# Altium PCB g3.PcbDoc
Units mm, origin at the board's own origin, x right, y up, seen from the top; angles counter-clockwise.
Board outline 274.95 x 168.53 mm, 2 copper layers (Top Layer, Bottom Layer); 104 components, 64 nets, 340 pads, 23 vias.
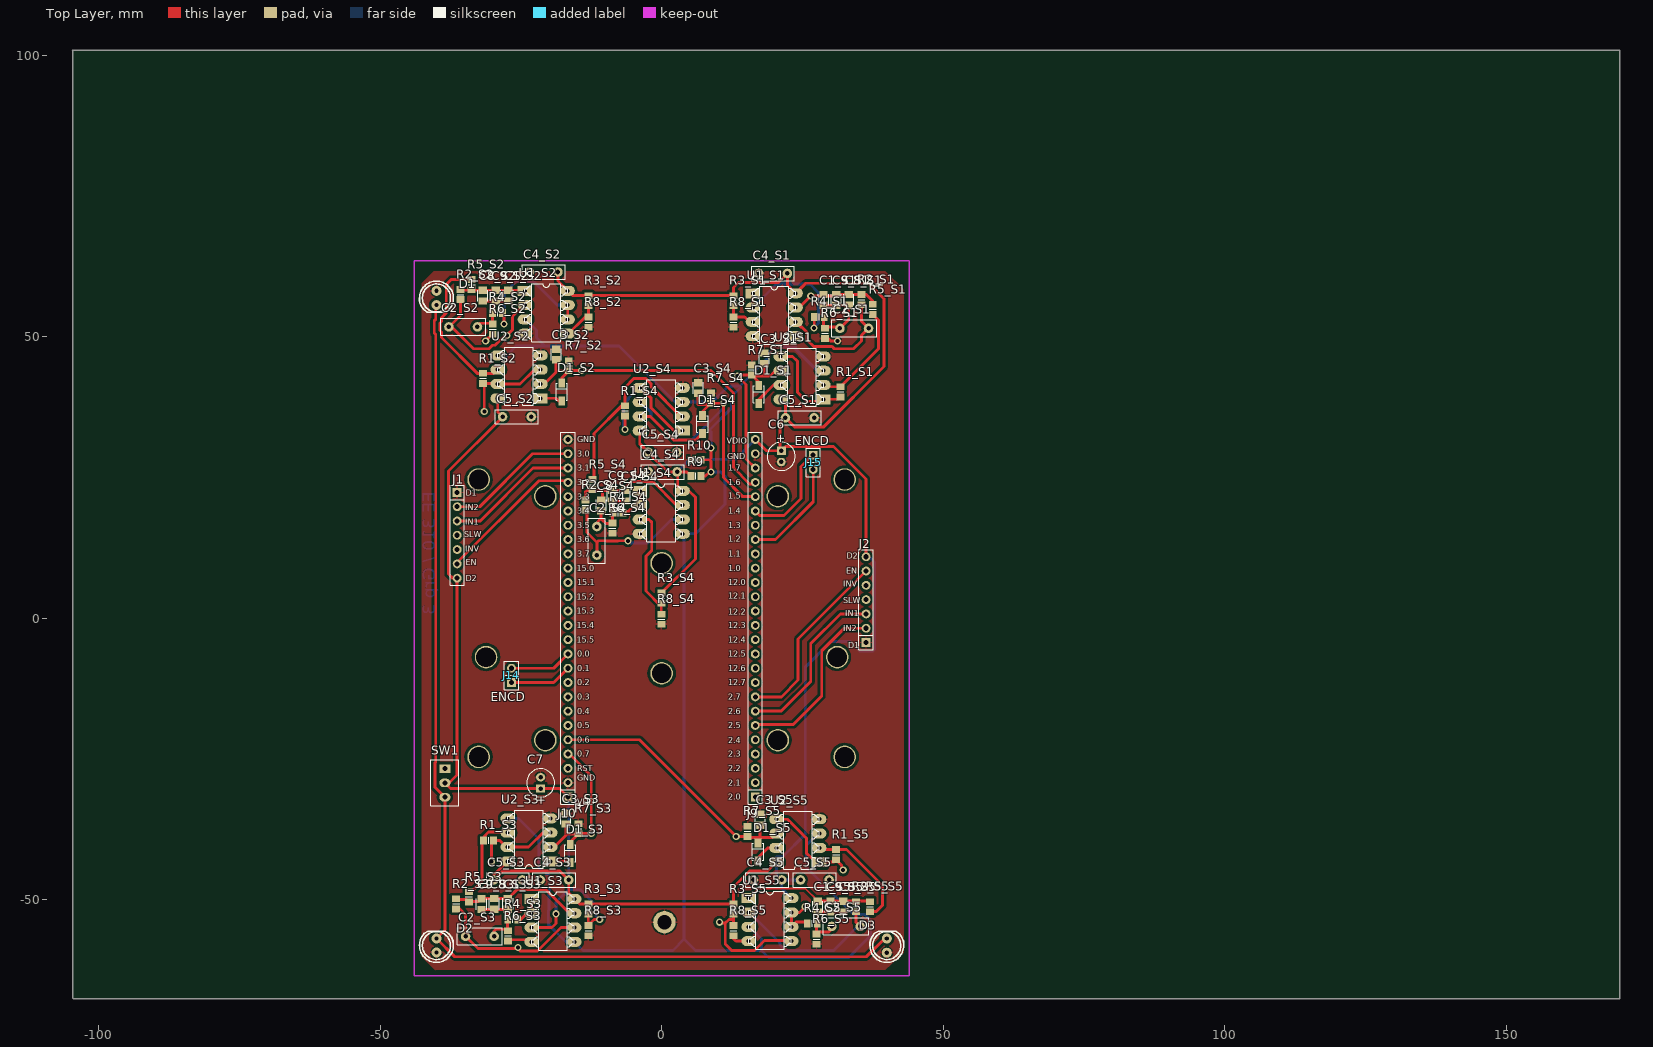
[diagram p0: Top Layer view]
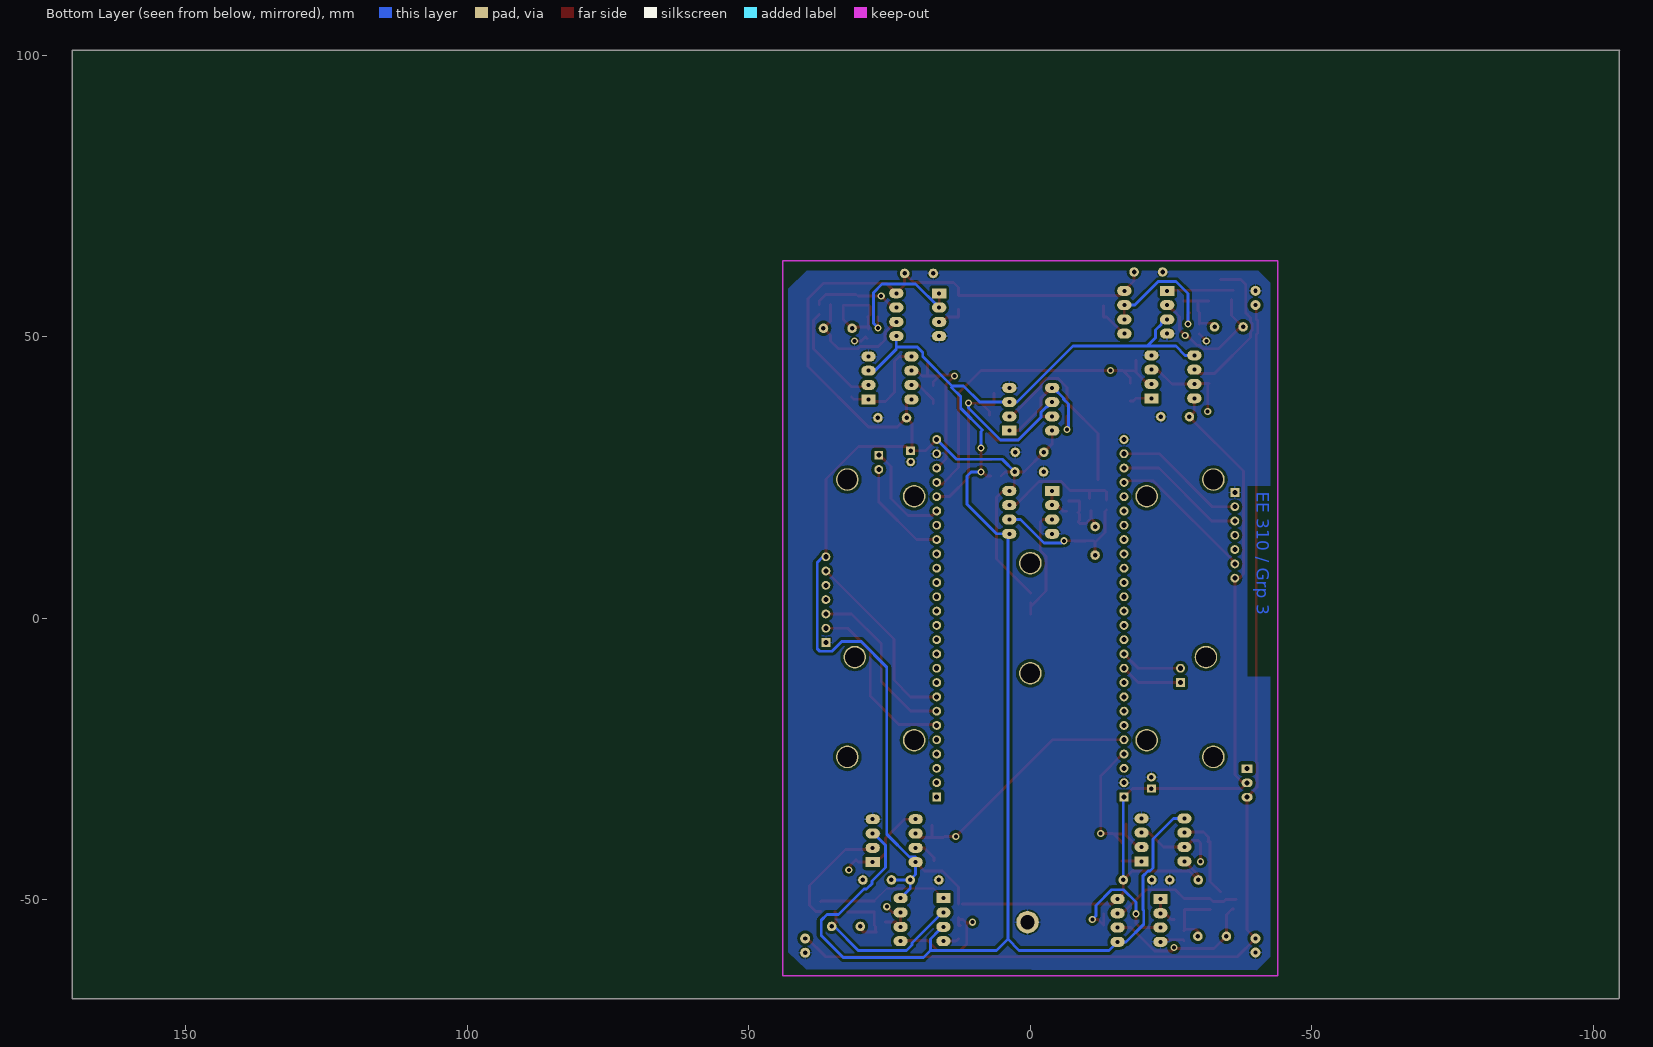
[diagram p1: Bottom Layer view, seen from below]
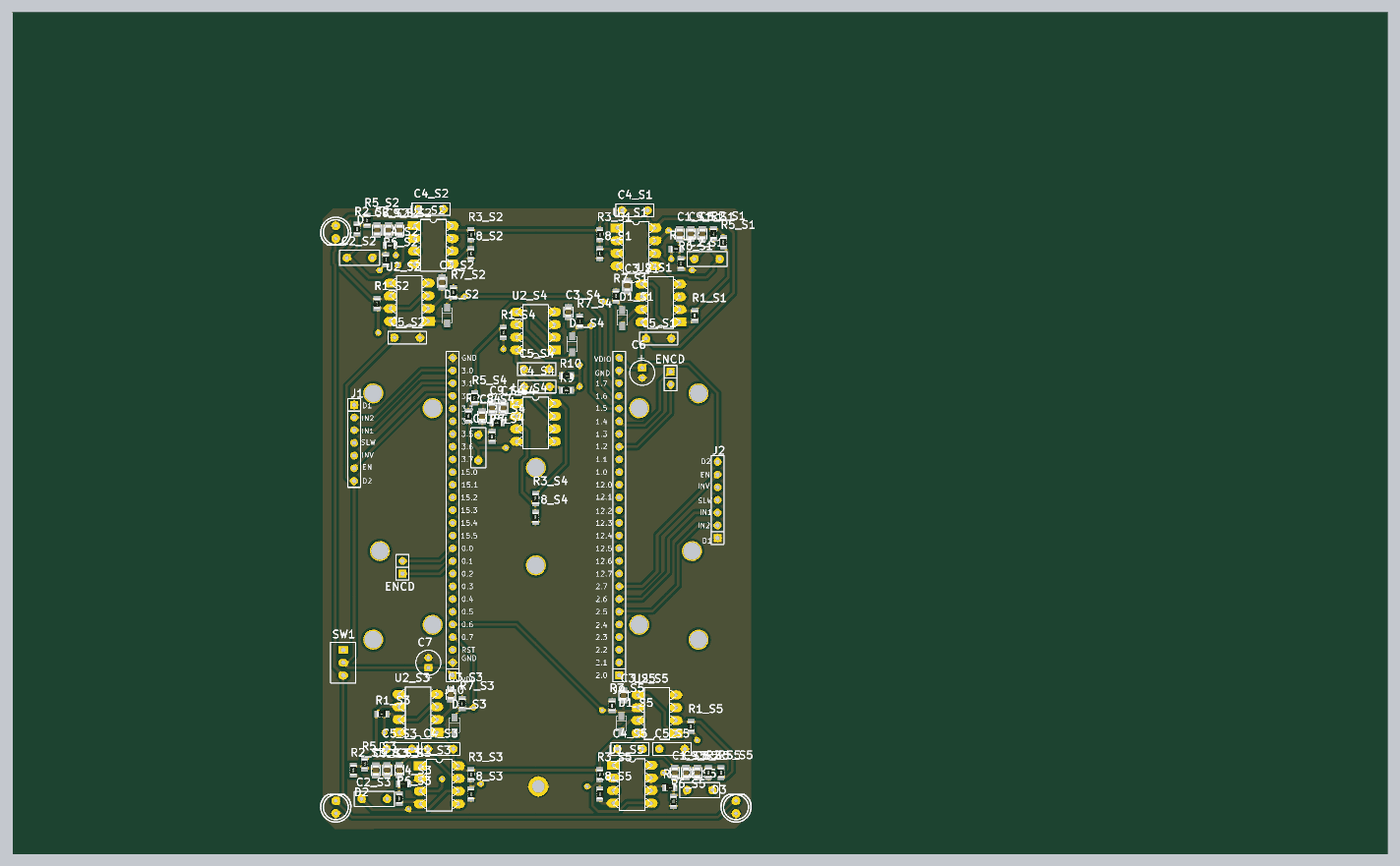
[diagram p2: 3D render of the assembled board from above, using the file's embedded part models]

## Layer stack, top to bottom
Top Solder: solder mask 0.0102, Solder Resist, Dk 3.5
Top Layer: signal copper 0.0356
Dielectric1: dielectric 0.32, FR-4, Dk 4.8
Bottom Layer: signal copper 0.0356
Bottom Solder: solder mask 0.0102, Solder Resist, Dk 3.5

## Board outline
-104.6,-67.48 -104.473,-67.607 170.228,-67.607 170.228,100.922 -104.727,100.922 -104.6,100.795 -104.6,-67.48

## Design rules (kind name [scope] priority, off if disabled: settings)
Clearance [All] p1: gap=0.5 ignorepadtopadclearanceinfootprint=FALSE
HoleSize [All] p1: absolutevalues=TRUE maxlimit=10 minlimit=0.025 maxpercent=80.000 minpercent=20.000
PolygonConnect [All] p1: connectstyle=Relief reliefconductorwidth=0.305 reliefentries=4 polygonreliefangle="90 Angle" airgapwidth=0.254
RoutingVias [All] p1: holewidth=0.7 width=1.7 viastyle="Through Hole" minholewidth=0.7 minwidth=1.6 maxholewidth=10 maxwidth=10
SilkToSolderMaskClearance SilkscreenOverComponentPads [IsPad] p1: minsilkscreentomaskgap=0.254 clearancetoexposedcopper=TRUE
SolderMaskExpansion [All] p1: expansion=0.102
Width [All] p1: maxlimit=0.762 minlimit=0.3 preferedwidth=0.6 minimp=50.000000 maximp=50.000000 favimp=50.000000
28 further rules are at their usual default settings.

## Classes and differential pairs
channel class 301_Sensor: S1 S2 S3 S4 S5
net class Vout[1..5]: Vout1 Vout2 Vout3 Vout4 Vout5
component class S1: C1_S1 C2_S1 C3_S1 C4_S1 C5_S1 C8_S1 C9_S1 D1_S1 R1_S1 R2_S1 R3_S1 R4_S1 R5_S1 R6_S1 R7_S1 R8_S1 U1_S1 U2_S1
component class S2: C1_S2 C2_S2 C3_S2 C4_S2 C5_S2 C8_S2 C9_S2 D1_S2 R1_S2 R2_S2 R3_S2 R4_S2 R5_S2 R6_S2 R7_S2 R8_S2 U1_S2 U2_S2
component class S3: C1_S3 C2_S3 C3_S3 C4_S3 C5_S3 C8_S3 C9_S3 D1_S3 R1_S3 R2_S3 R3_S3 R4_S3 R5_S3 R6_S3 R7_S3 R8_S3 U1_S3 U2_S3
component class S4: C1_S4 C2_S4 C3_S4 C4_S4 C5_S4 C8_S4 C9_S4 D1_S4 R1_S4 R2_S4 R3_S4 R4_S4 R5_S4 R6_S4 R7_S4 R8_S4 U1_S4 U2_S4
component class S5: C1_S5 C2_S5 C3_S5 C4_S5 C5_S5 C8_S5 C9_S5 D1_S5 R1_S5 R2_S5 R3_S5 R4_S5 R5_S5 R6_S5 R7_S5 R8_S5 U1_S5 U2_S5

## Components (designator, comment, footprint, x,y, rotation, side; value= is the part's Value field where it differs from the comment)
C1_S1 "1uF" ece-CC2012-0805 28.75,56.55 r270 top (schematic designator C1)
C1_S2 "1uF" ece-CC2012-0805 -27.25,57.3 r270 top (schematic designator C1)
C1_S3 "1uF" ece-CC2012-0805 -27.3,-50.73 r270 top (schematic designator C1)
C1_S4 "1uF" ece-CC2012-0805 -6.5,21.75 r270 top (schematic designator C1)
C1_S5 "1uF" ece-CC2012-0805 27.75,-51.25 r270 top (schematic designator C1)
C2_S1 "39nF" "FILM CAP-0.2" 34.21,51.5 r0 top (schematic designator C2)
C2_S2 "39nF" "FILM CAP-0.2" -35.25,51.75 r180 top (schematic designator C2)
C2_S3 "39nF" "FILM CAP-0.2" -32.29,-56.5 r180 top (schematic designator C2)
C2_S4 "39nF" "FILM CAP-0.2" -11.5,13.75 r270 top (schematic designator C2)
C2_S5 "39nF" "FILM CAP-0.2" 32.75,-54.75 r0 top (schematic designator C2)
C3_S1 "470nF" ece-CC2012-0805 18.256,46.164 r90 top (schematic designator C3)
C3_S2 "470nF" ece-CC2012-0805 -18.75,46.85 r90 top (schematic designator C3)
C3_S3 "470nF" ece-CC2012-0805 -17,-35.59 r90 top (schematic designator C3)
C3_S4 "470nF" ece-CC2012-0805 6.488,40.9 r90 top (schematic designator C3)
C3_S5 "470nF" ece-CC2012-0805 17.5,-35.8 r90 top (schematic designator C3)
C4_S1 "100nF" ece-RAD0.2 22.33,61.25 r180 top (schematic designator C4)
C4_S2 "100nF" ece-RAD0.2 -18.42,61.5 r180 top (schematic designator C4)
C4_S3 "100nF" ece-RAD0.2 -16.5,-46.5 r180 top (schematic designator C4)
C4_S4 "100nF" ece-RAD0.2 2.738,25.99 r180 top (schematic designator C4)
C4_S5 "100nF" ece-RAD0.2 21.33,-46.5 r180 top (schematic designator C4)
C5_S1 "100nF" ece-RAD0.2 22,35.6 r0 top (schematic designator C5)
C5_S2 "100nF" ece-RAD0.2 -28.256,35.786 r0 top (schematic designator C5)
C5_S3 "100nF" ece-RAD0.2 -29.83,-46.5 r0 top (schematic designator C5)
C5_S4 "100nF" ece-RAD0.2 -2.392,29.49 r0 top (schematic designator C5)
C5_S5 "100nF" ece-RAD0.2 24.67,-46.5 r0 top (schematic designator C5)
C6 "1uF" ece-RAD-CAP--5X6.8 21.25,29.75 r270 top
C7 "1uF" ece-RAD-CAP--5X6.8 -21.5,-30.25 r90 top
C8_S1 "1uF" ece-CC2012-0805 33.25,56.55 r270 top (schematic designator C8)
C8_S2 "1uF" ece-CC2012-0805 -31.75,57.3 r270 top (schematic designator C8)
C8_S3 "1uF" ece-CC2012-0805 -29.75,-50.75 r270 top (schematic designator C8)
C8_S4 "1uF" ece-CC2012-0805 -10.75,20.05 r270 top (schematic designator C8)
C8_S5 "1uF" ece-CC2012-0805 32.25,-51.25 r270 top (schematic designator C8)
C9_S1 "1uF" ece-CC2012-0805 31,56.55 r270 top (schematic designator C9)
C9_S2 "1uF" ece-CC2012-0805 -29.5,57.3 r270 top (schematic designator C9)
C9_S3 "1uF" ece-CC2012-0805 -32,-50.8 r270 top (schematic designator C9)
C9_S4 "1uF" ece-CC2012-0805 -8.75,21.75 r270 top (schematic designator C9)
C9_S5 "1uF" ece-CC2012-0805 30,-51.25 r270 top (schematic designator C9)
D1 "LED" LED0.1/5MM#1 -40,55.62 r180 top locked
D1_S1 "1N4148W-7-F" SOD123 17.25,39.75 r90 top (schematic designator D1)
D1_S2 "1N4148W-7-F" SOD123 -17.75,40.25 r90 top (schematic designator D1)
D1_S3 "1N4148W-7-F" SOD123 -16.25,-41.75 r90 top (schematic designator D1)
D1_S4 "1N4148W-7-F" SOD123 7.25,34.5 r90 top (schematic designator D1)
D1_S5 "1N4148W-7-F" SOD123 17.103,-41.471 r90 top (schematic designator D1)
D2 "LED" LED0.1/5MM#2 -40,-56.88 r0 top locked
D3 "LED" LED0.1/5MM#1 40,-56.88 r0 top locked
J1 "CON7" SIP7 -36.322,22.352 r270 top locked
J2 "CON7" SIP7 36.322,-4.318 r90 top locked
J9 "26PIN" SIP26 16.637,-31.75 r90 top locked
J10 "26PIN" SIP26 -16.637,-31.75 r90 top locked
J14 "ENCD" sip2 -26.67,-11.43 r90 top locked
J15 "ENCD" sip2 26.924,28.956 r270 top locked
R1_S1 "100K" RESC2012-0805SM 31.756,40.214 r270 top (schematic designator R1)
R1_S2 "100K" RESC2012-0805SM -31.75,42.6 r270 top (schematic designator R1)
R1_S3 "100K" RESC2012-0805SM -30.75,-39.5 r0 top (schematic designator R1)
R1_S4 "100K" RESC2012-0805SM -6.512,36.84 r270 top (schematic designator R1)
R1_S5 "100K" RESC2012-0805SM 31,-42 r270 top (schematic designator R1)
R2_S1 "330K" RESC2012-0805SM 35.5,56.6 r90 top (schematic designator R2)
R2_S2 "330K" RESC2012-0805SM -35.75,57.5 r90 top (schematic designator R2)
R2_S3 "330K" RESC2012-0805SM -36.5,-50.75 r90 top (schematic designator R2)
R2_S4 "330K" RESC2012-0805SM -13.5,20.1 r90 top (schematic designator R2)
R2_S5 "330K" RESC2012-0805SM 34.5,-51.25 r90 top (schematic designator R2)
R3_S1 "Light Sensor" RESC2012-0805SM 12.756,56.4 r90 top (schematic designator R3)
R3_S2 "Light Sensor" RESC2012-0805SM -13,56.4 r90 top (schematic designator R3)
R3_S3 "Light Sensor" RESC2012-0805SM -13,-51.65 r90 top (schematic designator R3)
R3_S4 "Light Sensor" RESC2012-0805SM -0.056,3.574 r90 top (schematic designator R3)
R3_S5 "Light Sensor" RESC2012-0805SM 12.756,-51.65 r90 top (schematic designator R3)
R4_S1 "4.7K" RESC2012-0805SM 28,53.5 r0 top (schematic designator R4)
R4_S2 "4.7K" RESC2012-0805SM -29.15,54.25 r180 top (schematic designator R4)
R4_S3 "4.7K" RESC2012-0805SM -26.45,-53.53 r180 top (schematic designator R4)
R4_S4 "4.7K" RESC2012-0805SM -7.75,18.75 r180 top (schematic designator R4)
R4_S5 "4.7K" RESC2012-0805SM 26.75,-54.25 r0 top (schematic designator R4)
R5_S1 "12K" RESC2012-0805SM 37.5,54.85 r90 top (schematic designator R5)
R5_S2 "12K" RESC2012-0805SM -33.75,59.25 r270 top (schematic designator R5)
R5_S3 "12K" RESC2012-0805SM -34.25,-49.5 r270 top (schematic designator R5)
R5_S4 "12K" RESC2012-0805SM -12.25,23.75 r270 top (schematic designator R5)
R5_S5 "12K" RESC2012-0805SM 37,-51.25 r90 top (schematic designator R5)
R6_S1 "47" RESC2012-0805SM 29,50.6 r90 top (schematic designator R6)
R6_S2 "47" RESC2012-0805SM -30,51.35 r90 top (schematic designator R6)
R6_S3 "47" RESC2012-0805SM -27.3,-56.43 r90 top (schematic designator R6)
R6_S4 "47" RESC2012-0805SM -8.75,16 r90 top (schematic designator R6)
R6_S5 "47" RESC2012-0805SM 27.5,-57 r90 top (schematic designator R6)
R7_S1 "330K" RESC2012-0805SM 16,44.1 r270 top (schematic designator R7)
R7_S2 "330K" RESC2012-0805SM -16.5,44.85 r270 top (schematic designator R7)
R7_S3 "330K" RESC2012-0805SM -14.75,-37.4 r270 top (schematic designator R7)
R7_S4 "330K" RESC2012-0805SM 8.738,39.09 r270 top (schematic designator R7)
R7_S5 "330K" RESC2012-0805SM 15.244,-37.864 r270 top (schematic designator R7)
R8_S1 "68K" RESC2012-0805SM 12.756,52.6 r90 top (schematic designator R8)
R8_S2 "68K" RESC2012-0805SM -13,52.6 r90 top (schematic designator R8)
R8_S3 "68K" RESC2012-0805SM -13,-55.5 r90 top (schematic designator R8)
R8_S4 "68K" RESC2012-0805SM -0.056,-0.176 r90 top (schematic designator R8)
R8_S5 "68K" RESC2012-0805SM 12.756,-55.5 r90 top (schematic designator R8)
R9 "100K" RESC2012-0805SM 6.1,25.25 r180 top
R10 "68K" RESC2012-0805SM 6.098,28.152 r0 top
SW1 "SW" ece-sw-SPDT -41.05,-25.15 r270 top
U1_S1 "LM393AN" ECE-DIP8 16.198,57.724 r0 top (schematic designator U1)
U1_S2 "LM393AN" ECE-DIP8 -24.308,58.16 r0 top (schematic designator U1)
U1_S3 "LM393AN" ECE-DIP8 -23.108,-49.87 r0 top (schematic designator U1)
U1_S4 "LM393AN" ECE-DIP8 -3.87,22.62 r0 top (schematic designator U1)
U1_S5 "LM393AN" ECE-DIP8 15.442,-49.74 r0 top (schematic designator U1)
U2_S1 "LM393AN" ECE-DIP8 28.756,38.884 r180 top (schematic designator U2)
U2_S2 "LM393AN" ECE-DIP8 -21.5,39.07 r180 top (schematic designator U2)
U2_S3 "LM393AN" ECE-DIP8 -19.75,-43.18 r180 top (schematic designator U2)
U2_S4 "LM393AN" ECE-DIP8 3.738,33.31 r180 top (schematic designator U2)
U2_S5 "LM393AN" ECE-DIP8 28,-43.33 r180 top (schematic designator U2)

## Footprints (in the part's own frame and the unit in brackets; to place one, negate y for a bottom-side part, rotate by r counter-clockwise, add the part's x,y. Pads: shape width x height; smd on the part's side, far side on the other; paste and mask are expansions set on the pad)
ece-CC2012-0805 [mm] "SM capacitor 0805"
  rect 1.3x1.5 smd: 1(-0.95,0) 2(0.95,0)
  silkscreen extent -1,-0.9 1,0.9, body extent -1,-0.6 1,0.6, height 1.2
ECE-DIP8 [mil]
  rect 100x70 hole 28: 1(0,0)
  oval 100x70 hole 28: 2(0,-100) 3(0,-200) 4(0,-300) 5(300,-300) 6(300,-200) 7(300,-100) 8(300,0)
  silkscreen extent 0,-357 300,50
ece-RAD0.2 [mm]
  round 1.7 hole 0.8: 1(0,0) 2(5.08,0)
  silkscreen extent -1.27,-1.27 6.35,1.27
ece-RAD-CAP--5X6.8 [mm] "Cap 5 X 6.8"
  rect 1.45x1.6 hole 0.8: 1(0,0)
  oval 1.45x1.6 hole 0.8: 2(2,0)
  silkscreen extent -1.5,-2.5 3.5,2.5
ece-sw-SPDT [mm] "PCB mountable spdt switch"
  rect 1.5x2 hole 0.9: 1(1.56,2.55)
  oval 1.5x2 hole 0.9: 2(4.1,2.55) 3(6.64,2.55)
  silkscreen extent 0,0 8.15,5.05
"FILM CAP-0.2" [mm]
  round 1.7 hole 0.8: 1(-2.54,0) 2(2.54,0)
  silkscreen extent -4,-1.5 4,1.5, body extent -3.81,-1.27 3.81,1.27, height 7
LED0.1/5MM#1 [mil]
  round 70 hole 30: A(0,0) K(0,-100)
  silkscreen extent -118,-168 118,50
LED0.1/5MM#2 [mil]
  round 70 hole 30: A(0,0) K(0,-98.43)
  silkscreen extent -118,-168 118,50
RESC2012-0805SM [mm] "Chip Resistor, Body 2.0x1.3mm, IPC Medium Density"
  rect 1.2x1.4 smd: 1(-0.9,0) 2(0.9,0)
  silkscreen extent 0,-0.6 0,0.6, body extent -1,-0.62 1,0.63, height 0.5
sip2 [mil]
  rect 62x62 hole 35.43: 1(0,0)
  round 62 hole 35.43: 2(100,0)
  silkscreen extent -50,-50 150,50
SIP7 [mil]
  rect 62x62 hole 35.43: 1(0,0)
  round 62 hole 35.43: 2(100,0) 3(200,0) 4(300,0) 5(400,0) 6(500,0) 7(600,0)
  silkscreen extent -50,-50 650,50
SIP26 [mil]
  rect 62x62 hole 35.43: 1(0,0)
  round 62 hole 35.43: 2(100,0) 3(200,0) 4(300,0) 5(400,0) 6(500,0) 7(600,0) 8(700,0) 9(800,0) 10(900,0) 11(1000,0) 12(1100,0) 13(1200,0) 14(1300,0) 15(1400,0) 16(1500,0) 17(1600,0) 18(1700,0) 19(1800,0) 20(1900,0) 21(2000,0) 22(2100,0) 23(2200,0) 24(2300,0) 25(2400,0) 26(2500,0)
  silkscreen extent -50,-50 2550,50
SOD123 [mm] "SOD-123; 2 Leads; Body 2.7 x 1.6 mm, (LxW)"
  rect 1.6x1.2 smd: 1(-1.65,0) 2(1.55,0)
  silkscreen extent -1.5,-1 1.5,1, body extent -1.8,-0.86 1.8,0.86, height 1.21

## Part data
C1_S1 C1_S2 C1_S3 C1_S4 C1_S5 C2_S1 C2_S2 C2_S3 C2_S4 C2_S5 C3_S1 C3_S2 C3_S3 C3_S4 C3_S5 C8_S1 C8_S2 C8_S3 C8_S4 C8_S5 C9_S1 C9_S2 C9_S3 C9_S4 C9_S5: library part "CAP SM0805", "SM capacitor"
C4_S1 C4_S2 C4_S3 C4_S4 C4_S5 C5_S1 C5_S2 C5_S3 C5_S4 C5_S5: library part CAP, "Capacitor Non Polarised Through Hole"
C6 C7: library part "CAP 1-10uF TH", "Polarized Capacitor (Radial)", Manufacturer="Generic Components", Class I=Passive, Class II=Capacitor, Published=8-Jun-2000, Publisher="Altium Limited", Revision="July-2002: Re-released for DXP Platform."
D1_S1 D1_S2 D1_S3 D1_S4 D1_S5: library part "SMT-Diode 1N4148W-7-F", "DIODE GEN PURP 100V 300MA SOD123", Base Part Number=1N4148W, Capacitance @ Vr, F="2pF @ 0V, 1MHz", Current - Average Rectified (Io)=150mA, Manufacturer="Diodes Incorporated", Manufacturer Part Number=1N4148W-13-F, Operating Temperature - Junction="-65°C ~ 150°C", Package / Case=SOD-123, Supplier Part Number 1=1N4148W-13FDICT-ND, Category="Discrete Semiconductor Products", ComponentLink1Description=https://www.diodes.com/assets/Datasheets/ds30086.pdf, ComponentLink1URL=https://www.diodes.com/assets/Datasheets/ds30086.pdf, Diode Type=Standard, Mounting Type="Surface Mount", Packaging="Cut Tape (CT)", Part Status=Active, Pricing 1="1=0.33, 10=0.292, 100=0.1586, 500=0.0976, 1000=0.06656 (NZD)", RoHS="RoHS Compliant", Speed="Small Signal =< 200mA (Io), Any Speed", Stock 1=5282, Supplier 1=Digi-Key, Supplier Device Package=SOD-123
J1 J2: "Connector"
J14 J15: library part CON2, "Connector"
R1_S1 R1_S2 R1_S3 R1_S4 R1_S5 R2_S1 R2_S2 R2_S3 R2_S4 R2_S5 R3_S1 R3_S2 R3_S3 R3_S4 R3_S5 R4_S1 R4_S2 R4_S3 R4_S4 R4_S5 R5_S1 R5_S2 R5_S3 R5_S4 R5_S5 R6_S1 R6_S2 R6_S3 R6_S4 R6_S5 R7_S1 R7_S2 R7_S3 R7_S4 R7_S5 R8_S1 R8_S2 R8_S3 R8_S4 R8_S5 R9 R10: library part "Res SM 0805", "SM resistor"
SW1: library part switch-SPDT, "PCB mountabel switch"
U1_S1 U1_S2 U1_S3 U1_S4 U1_S5 U2_S1 U2_S2 U2_S3 U2_S4 U2_S5: "Dual Comparator", ComponentLink1Description="Manufacturer Link", ComponentLink1URL=http://www.onsemi.com/site/products/taxonomy/0,4438,133,00.html, DatasheetVersion=1988, LatestRevisionDate=06-Jun-2005, LatestRevisionNote="Stylized 3D Model Added.", PackageDescription="DIP; 8 Leads; Row Spacing 7.62 mm; Pitch 2.54 mm", PackageReference=626-05, Published=17-Jul-2002, Publisher="Altium Limited"

## Free pads (board coordinates)
  round 4 hole 3.5 unplated: 0(-32.512,-24.638) 0(-32.512,24.638) 0(-31.191,-6.909) 0(0,-9.779) 0(0,9.779) 0(31.191,-6.909) 0(32.512,-24.638) 0(32.512,24.638) 1(-20.65,-21.666) 1(-20.65,21.666) 1(20.65,-21.666) 1(20.65,21.666)
  round 4 hole 2.54: 6(0.5,-54)

## Via types
v1: diameter 1.27, hole 0.711, Top Layer to Bottom Layer, 22 vias
v2: diameter 1.27, hole 0.7, Top Layer to Bottom Layer, 1 vias

## Nets (pads, with @x,y where several pads share a name; then routed paths per layer and width w, separated by ;. In a path a pad name is that pad's centre, name@x,y a point inside that pad or via, vN(x,y) a via of type N, cw(c..) or ccw(c..) an arc to the next point about the centre after c; other vN are vias at no path point)
2V: R9.1 R10.2 U1_S1.5 U1_S2.3 U1_S3.5 U1_S4.5 U1_S5.3 U2_S1.3 U2_S2.5 U2_S3.5 U2_S4.3 U2_S5.3 | length 308.2
  Top Layer w0.508: U2_S3.5@-28.06,-35.56 U2_S3.5 ; R10.2 8.473,28.152 8.5,28.125 ; R9.1 7.75,25.25 8.5,26 v1(8.75,26) 8.75,27.875 8.5,28.125 ; v1(8.75,30.25) 8.75,28.375 8.5,28.125
  Bottom Layer w0.508: U2_S2.5 -27.491,46.69 -25.848,48.333 -20.75,48.333 ; U2_S3.5 -25.44,-35.56 -21.774,-39.226 -21.774,-44.381 -21.259,-44.896 -20.916,-44.896 -19.976,-45.836 -19.976,-51.762 -20.139,-51.925 -20.139,-54.361 -17.01,-57.49 U1_S3.5 -13.975,-59.003 1.997,-59.003 4,-57 ; U1_S2.3@-24.494,53.266 U1_S2.3 -23.58,53.08 -23.246,52.746 -23.246,52.183 -22.25,51.187 -22.25,49.833 -20.75,48.333 ; v1(8.75,26) 10.5,26 11.25,25.25 11.25,20.25 6,15 U1_S4.5 4,14.75 4,-57 ; v1(8.75,30.25) 8.75,33.171 8.5,33.421 12.377,37.298 12.377,39.377 14,41 13.75,41.25 11.854,41.25 8.994,38.39 U2_S4.3 3.738,37.988 3.336,38.39 2.346,38.39 -7.597,48.333 -20.75,48.333 ; 13.894,41.25 19.112,46.468 19.112,47.185 20.074,48.147 23.818,48.147 ; U1_S5.3 15.442,-55.442 16.229,-55.442 17.75,-56.963 17.75,-59.003 ; U1_S1.5 23.818,48.147 ; U2_S5.3@26.873,-38.25 27.835,-38.25 25.75,-40.335 25.75,-44.305 28.146,-46.701 28.146,-47.164 29.086,-48.104 29.549,-48.104 34.056,-52.611 36.111,-52.611 37.144,-53.644 37.144,-56.356 33.25,-60.25 18.997,-60.25 17.75,-59.003 ; U2_S1.3 27.629,43.964 23.818,47.775 23.818,48.147 ; 4,-57 6.003,-59.003 17.75,-59.003
CHA1: J10.10 J14.1 | length 11.1
  Top Layer w0.508: J14.1 -19.177,-11.43 J10.10
CHA2: J9.21 J15.1 | length 19.1
  Top Layer w0.508: J9.21 17.437,18.25 21.75,18.25 24.75,21.25 24.75,26.961 26.924,29.135 J15.1 J15.1@26.924,28.5
CHB1: J10.11 J14.2 | length 11.1
  Top Layer w0.508: J14.2 -19.177,-8.89 J10.11
CHB2: J9.19 J15.2 | length 18.8
  Top Layer w0.508: J9.19 20.22,13.97 26.924,20.674 J15.2
GND: C3_S1.2 C3_S2.2 C3_S3.2 C3_S4.2 C3_S5.2 C4_S1.2 C4_S2.2 C4_S3.2 C4_S4.2 C4_S5.2 C5_S1.2 C5_S2.2 C5_S3.2 C5_S4.2 C5_S5.2 C6.2 C7.2 D1.K D2.K D3.K J1.1 J2.1 J9.25 J10.2 J10.26 pad.6 R6_S1.1 R6_S2.1 R6_S3.1 R6_S4.1 R6_S5.1 R7_S1.1 R7_S2.1 R7_S3.1 R7_S4.1 R7_S5.1 R8_S1.1 R8_S2.1 R8_S3.1 R8_S4.1 R8_S5.1 R10.1 U1_S1.4 U1_S2.4 U1_S3.4 U1_S4.4 U1_S5.4 U2_S1.4 U2_S2.4 U2_S3.4 U2_S4.4 U2_S5.4 | length 11.8
  Top Layer w0.508: v1(-31.25,49.25) -31.25,49.3 -30.05,50.5 R6_S2.1 ; R6_S3.1 -27.081,-57.111 -24.25,-57.111 -23.871,-57.49 U1_S3.4 ; R8_S5.1@12.756,-56.936 13.18,-57.36 U1_S5.4 ; R6_S1.1 29.3,50 30.05,49.25 v1(31.25,49.25)
NetC1_S1_1: C1_S1.1 C8_S1.1 C9_S1.1 R2_S1.2 R5_S1.2 U1_S1.7 | length 15.8
  Top Layer w0.508: U1_S1.7 24.434,55.184 v1(26.5,57.25) C9_S1.1@30.6,57.25 ; C9_S1.1 C8_S1.1 R2_S1.2 36.342,57.5 37.5,56.342 R5_S1.2
  Bottom Layer w0.508: U1_S1.7 U1_S1.7@24.434,55.184
NetC1_S1_2: C1_S1.2 C2_S1.1 C8_S1.2 C9_S1.2 R4_S1.2 R6_S1.2 | length 16.1
  Top Layer w0.508: C1_S1.2@28.5,55.35 28.5,53.9 R4_S1.2 28.75,53.35 28.75,51.4 29.064,51.714 C2_S1.1@31.256,51.714 ; C1_S1.2 C9_S1.2 C8_S1.2 33.25,53.08 C2_S1.1
NetC1_S2_1: C1_S2.1 C8_S2.1 C9_S2.1 R2_S2.2 R5_S2.2 U1_S2.1 | length 11.7
  Top Layer w0.508: R2_S2.2@-36,58.25 C8_S2.1 C9_S2.1 C1_S2.1 -24.398,58.25 U1_S2.1
NetC1_S2_2: C1_S2.2 C2_S2.1 C8_S2.2 C9_S2.2 R4_S2.2 R6_S2.2 | length 11
  Top Layer w0.508: C2_S2.1@-32.25,52.4 -30.15,52.4 R6_S2.2@-30.05,52.3 ; C8_S2.2 C9_S2.2@-29.75,56.35 ; R6_S2.2 R6_S2.2@-30.05,52.3 ; C1_S2.2 C9_S2.2 C9_S2.2@-29.75,56.35 ; R6_S2.2@-30.05,52.3 R4_S2.2 -29.75,54.55 C9_S2.2@-29.75,56.35
NetC1_S3_1: C1_S3.1 C8_S3.1 C9_S3.1 R2_S3.2 R5_S3.2 U1_S3.7 | length 24.8
  Top Layer w0.508: R2_S3.2 -36.5,-49.954 -34.696,-49.954 R5_S3.2 -34.25,-50.346 -32.496,-50.346 C9_S3.1 -31.93,-49.78 C1_S3.1 -25.747,-48.227 -20.523,-48.227 -16.34,-52.41 U1_S3.7 U1_S3.7@-14.654,-52.41
NetC1_S3_2: C1_S3.2 C2_S3.1 C8_S3.2 C9_S3.2 R4_S3.2 R6_S3.2 | length 12
  Top Layer w0.508: C9_S3.2 -27.37,-51.75 -27.35,-51.73 R4_S3.2 R6_S3.2@-27.35,-55.48 ; C2_S3.1 -29.75,-55.58 -29.42,-55.25 -27.58,-55.25 R6_S3.2@-27.35,-55.48 ; R6_S3.2 R6_S3.2@-27.35,-55.48
NetC1_S4_1: C1_S4.1 C8_S4.1 C9_S4.1 R2_S4.2 R5_S4.2 U1_S4.7 | length 22.6
  Top Layer w0.508: R2_S4.2 -13.5,22.46 -13.25,22.71 -10.5,22.71 ; C8_S4.1@-10.5,21.25 -10.5,22.71 ; U1_S4.7 2.67,20.08 -1.513,24.263 -5.487,24.263 -7.04,22.71 -10.5,22.71
NetC1_S4_2: C1_S4.2 C2_S4.1 C8_S4.2 C9_S4.2 R4_S4.2 R6_S4.2 | length 11.3
  Top Layer w0.508: C2_S4.1 -11.5,17 -10.75,17.75 C8_S4.2 ; -10.55,17.5 -9.9,16.85 -8.76,16.85 -8.5,17.11 -8.5,17.15 -8.75,17.4 -8.75,18.5 R4_S4.2@-8.45,18.8 ; R4_S4.2@-8.65,19 -8.75,19.1 C9_S4.2 C1_S4.2@-6.75,20.8
NetC1_S5_1: C1_S5.1 C8_S5.1 C9_S5.1 R2_S5.2 R5_S5.2 U1_S5.1 | length 23.5
  Top Layer w0.3: U1_S5.1 17.182,-48 25.53,-48 C1_S5.1@27.744,-50.214
  Top Layer w0.508: C1_S5.1@27.744,-50.214 37.114,-50.214 R5_S5.2@37.25,-50.35
NetC1_S5_2: C1_S5.2 C2_S5.1 C8_S5.2 C9_S5.2 R4_S5.2 R6_S5.2 | length 11.7
  Top Layer w0.508: C1_S5.2@27.744,-52.2 27.744,-54.506 27.5,-54.75 27.5,-55.57 27.32,-55.75 29.71,-55.75 C2_S5.1@30.46,-55 ; C1_S5.2@28,-52.2 C9_S5.2 C8_S5.2 C8_S5.2@32.5,-52.2
NetC2_S1_2: C2_S1.2 R2_S1.1 U1_S1.6 | length 22.5
  Top Layer w0.508: U1_S1.6 24.715,51.747 24.88,51.747 25.842,50.785 25.842,49.423 27.023,48.242 30.294,48.242 30.675,47.861 34.111,47.861 35.5,49.25 35.5,50.25 C2_S1.2 35.5,52.75 R2_S1.1
NetC2_S2_2: C2_S2.2 R2_S2.1 U1_S2.2 | length 24.8
  Top Layer w0.508: C2_S2.2 -35.75,53.79 R2_S2.1 ; C2_S2.2@-37.29,51.75 -33.401,47.861 -30.675,47.861 -30.035,48.5 -29.584,48.5 -28,50.084 v1(-27.5,50.25) -26.5,51.25 -26.5,53.593 -25.37,54.723 -25.205,54.723 U1_S2.2
NetC2_S3_2: C2_S3.2 R2_S3.1 U1_S3.6 | length 28.6
  Top Layer w0.508: R2_S3.1@-36.05,-51.68 -35.82,-51.68 -34.83,-52.67 C2_S3.2 -32.646,-58.684 -25.684,-58.684 v2@-25.625,-58.625 ; U1_S3.6 -17.863,-54.95 -22.046,-59.133 -25.117,-59.133 v2@-25.625,-58.625 ; v2@-25.625,-58.625 -25.75,-58.5 -25.5,-58.25 v2(-25.5,-58.5) v2@-25.625,-58.625
NetC2_S4_2: C2_S4.2 R2_S4.1 U1_S4.6 | length 26.1
  Top Layer w0.508: R2_S4.1 -13.25,18.95 -13.25,15.228 -11.5,13.478 ; C2_S4.2 -11.5,13.478 ; v1(-6,13.75) -7.734,13.75 -7.738,13.746 -9.762,13.746 -9.766,13.75 -11.228,13.75 -11.5,13.478
  Bottom Layer w0.508: v1(-6,13.75) -5.607,13.357 -2.43,13.357 1.753,17.54 U1_S4.6
NetC2_S5_2: C2_S5.2 R2_S5.1 U1_S5.2 | length 27.3
  Top Layer w0.508: R2_S5.1@34.75,-52.15 34.54,-52.36 34.54,-54 C2_S5.2 C2_S5.2@35.54,-55
  Bottom Layer w0.508: U1_S5.2 15.607,-52.28 21.038,-57.711 21.038,-58.041 22,-59.003 30.571,-59.003 C2_S5.2@34.713,-54.861
NetC3_S1_1: C3_S1.1 D1_S1.2 J9.24 R7_S1.2 U2_S1.6 | length 30.2
  Top Layer w0.508: J9.24 15,28.307 15,41.5 v1(13.5,43) 13.7,43.2 R7_S1.2 R7_S1.2@16.186,43.014 ; D1_S1.2 17.25,41.95 R7_S1.2@16.186,43.014 ; C3_S1.1 18.256,43.014 ; U2_S1.6 20.214,43.964 19.264,43.014 18.256,43.014 ; R7_S1.2@16.186,43.014 18.256,43.014
NetC3_S2_1: C3_S2.1 D1_S2.2 J9.23 R7_S2.2 U2_S2.2 | length 59.5
  Top Layer w0.508: U2_S2.2 -20.84,41.61 -18.75,43.7 ; C3_S2.1 -18.75,43.7 ; D1_S2.2 -17.75,42.7 R7_S2.2 ; J9.23@16,23.87 15.63,23.87 12.75,26.75 12.75,40 8.75,44 v1(-14.25,44) -16.45,44 R7_S2.2 ; -18.75,43.7 -18.5,43.95 R7_S2.2
NetC3_S3_1: C3_S3.1 D1_S3.2 J10.4 R7_S3.2 U2_S3.2 | length 28.5
  Top Layer w0.508: U2_S3.2 -19.09,-40.64 -17,-38.55 ; C3_S3.1 -17,-38.55 ; J10.4 -16.37,-24.13 -12.5,-28 v1(-12.5,-38.25) -14.7,-38.25 R7_S3.2 ; D1_S3.2@-16.25,-39.95 -16.25,-39.8 R7_S3.2 ; -17,-38.55 -16.75,-38.3 R7_S3.2
NetC3_S4_1: C3_S4.1 D1_S4.2 J9.22 R7_S4.2 U2_S4.6 | length 50.7
  Top Layer w0.508: C3_S4.1 6.488,37.94 R7_S4.2@8.488,37.94 ; D1_S4.2 7.25,36.702 R7_S4.2@8.488,37.94 ; J9.22 14.41,21.59 10.988,25.012 v1(10.988,38.24) 10.938,38.19 R7_S4.2 R7_S4.2@8.488,37.94
  Bottom Layer w0.508: U2_S4.6 -2.985,37.493 -2.82,37.493 -1.858,36.531 -1.858,35.681 2.156,31.667 5.32,31.667 10.988,37.335 v1(10.988,38.24)
NetC3_S5_1: C3_S5.1 D1_S5.2 J10.5 R7_S5.2 U2_S5.6 | length 46.4
  Top Layer w0.508: J10.5 -3.91,-21.59 v1(13.25,-38.75) ; v1@13.514,-38.764 R7_S5.2 15.43,-38.95 17.5,-38.95 ; C3_S5.1 17.5,-38.95 ; U2_S5.6 19.68,-38.95 17.5,-38.95
NetD1_A: D1.A D2.A D3.A SW1.3 | length 196.9
  Top Layer w0.508: D1.A@-40.12,55.5 -40.12,53.114 -40.402,52.832 -40.402,50.668 -40.12,50.386 -40.12,-25.514 -40.254,-25.648 -40.254,-28.627 -40.254,-30.036 SW1.3 -38.5,-55.38 D2.A -36.739,-60.141 36.359,-60.141 39.81,-56.69 D3.A ; D1.A@-40.008,55.612 -40.008,55.62 D1.A D1.A@-40.008,55.612
NetD1_S1_1: D1_S1.1 U2_S1.7 | length 5.7
  Top Layer w0.508: D1_S1.1 17.25,38.808 19.866,41.424 U2_S1.7
NetD1_S2_1: D1_S2.1 U2_S2.1 | length 3.9
  Top Layer w0.508: U2_S2.1 -18.75,39.07 -18.28,38.6 D1_S2.1
NetD1_S3_1: D1_S3.1 U2_S3.1 | length 3.5
  Top Layer w0.508: U2_S3.1 -19.72,-43.15 D1_S3.1@-16.25,-43.15
NetD1_S4_1: D1_S4.1 U2_S4.7 | length 13.4
  Top Layer w0.508: U2_S4.7 -2.027,35.85 2.156,31.667 6.067,31.667 D1_S4.1
NetD1_S5_1: D1_S5.1 U2_S5.7 | length 4.6
  Top Layer w0.508: D1_S5.1 17.103,-42.547 18.86,-40.79 U2_S5.7
NetR1_S1_1: R1_S1.1 R5_S1.1 U2_S1.2 | length 19.2
  Top Layer w0.508: U2_S1.2 29.066,41.114 R1_S1.1 38.492,47.85 38.492,52.958 R5_S1.1
NetR1_S1_2: R1_S1.2 U2_S1.1 U2_S1.5 | length 17.2
  Top Layer w0.508: U2_S1.5 23.246,46.504 24.107,45.643 24.107,40.143 25.75,38.5 27.878,38.5 U2_S1.1@28.427,39.049 ; U2_S1.1 31.326,38.884 R1_S1.2
NetR1_S2_1: R1_S2.1 R5_S2.1 U2_S2.6 | length 27.8
  Top Layer w0.508: R5_S2.1 -37.366,60.15 -38.25,59.266 -38.25,54.25 -39.112,53.388 -39.112,52.696 -39.394,52.414 -39.394,51.086 -39.112,50.804 -39.112,49.862 -32.75,43.5 R1_S2.1 -29.77,43.5 U2_S2.6
NetR1_S2_2: R1_S2.2 U2_S2.3 U2_S2.7 | length 16.4
  Top Layer w0.508: v1(-31.5,36.75) -31.5,41.45 R1_S2.2 -29.21,41.7 U2_S2.7 -25.14,41.61 -22.6,44.15 U2_S2.3
NetR1_S3_1: R1_S3.1 R5_S3.1 U2_S3.6 | length 15.6
  Top Layer w0.508: R5_S3.1@-33.75,-48.6 -31.9,-46.75 -31.9,-39.65 -31.5,-39.65 R1_S3.1 -31.65,-38.9 -30.75,-38 -27.47,-38 U2_S3.6
NetR1_S3_2: R1_S3.2 U2_S3.3 U2_S3.7 | length 15.5
  Top Layer w0.508: v1(-30.25,-43.25) -30.25,-39.9 R1_S3.2 -28.75,-39.5 -27.61,-40.64 U2_S3.7 -23.64,-40.64 -21.1,-38.1 U2_S3.3
NetR1_S4_1: R1_S4.1 R5_S4.1 U2_S4.2 | length 33
  Top Layer w0.508: R5_S4.1@-12,24.55 -12,32.818 -7.078,37.74 R1_S4.1 -6.512,41.005 -4.944,42.573 -2.82,42.573 -1.858,41.611 -1.858,41.108 3.4,35.85 U2_S4.2
NetR1_S4_2: R1_S4.2 U2_S4.1 U2_S4.5 | length 23.6
  Top Layer w0.508: v1@-6.562,33.24 -6.512,33.29 v1(-6.512,33.5) R1_S4.2 ; U2_S4.5 -3.717,40.93 -1.858,39.071 -1.858,37.358 2.19,33.31 U2_S4.1
  Bottom Layer w0.508: v1@-6.562,33.24 -6.75,33.428 -6.75,38.062 -5.906,38.906 -6,39 -4.07,40.93 U2_S4.5
NetR1_S5_1: R1_S5.1 R5_S5.1 U2_S5.2 | length 20
  Top Layer w0.508: U2_S5.2 28.31,-41.1 R1_S5.1 32.85,-41.1 39.25,-47.5 39.25,-51 38.136,-52.114 37.286,-52.114 R5_S5.1@37.25,-52.15
NetR1_S5_2: R1_S5.2 U2_S5.1 U2_S5.5 | length 17.9
  Top Layer w0.508: U2_S5.5 22.377,-35.71 25.75,-39.083 25.75,-41.75 27.33,-43.33 U2_S5.1 30.57,-43.33 R1_S5.2 32,-43.9 32,-44.5 v1(32.25,-44.75)
NetR3_S1_1: R3_S1.1 R8_S1.2 U1_S1.3 | length 5.2
  Top Layer w0.508: 12.75,54.889 12.75,53.5 R8_S1.2 14.75,53.5 15.606,52.644 U1_S1.3
NetR3_S2_1: R3_S2.1 R8_S2.2 U1_S2.5 | length 6.9
  Top Layer w0.508: U1_S2.5@-16.699,50.551 -16.515,50.551 -15.629,51.437 -15.626,51.437 -14.664,52.399 -14.664,52.402 -13.566,53.5 R8_S2.2 R3_S2.1
NetR3_S3_1: R3_S3.1 R8_S3.2 U1_S3.3 | length 24.8
  Top Layer w0.508: U1_S3.3 -19.45,-54.95 -18.75,-54.25 v1(-18.75,-52.5) ; R3_S3.1@-13.044,-52.566 -13.044,-54.516 -12.028,-53.5 v1(-11,-53.5)
  Bottom Layer w0.508: v1(-18.75,-52.5) -18.75,-50.427 -16.55,-48.227 -14.426,-48.227 -11.639,-51.014 -11.639,-52.861 v1(-11,-53.5)
NetR3_S4_1: R3_S4.1 R8_S4.2 U1_S4.3 | length 20.7
  Top Layer w0.508: U1_S4.3 -2.25,17.54 -1.75,17.04 -1.75,12 -2.754,10.996 -2.758,7.011 -2.758,4.81 R3_S4.1@-0.056,2.108 ; R8_S4.2 R3_S4.1@-0.056,2.108 ; R3_S4.1 R3_S4.1@-0.056,2.108
NetR3_S5_1: R3_S5.1 R8_S5.2 U1_S5.5 | length 21.3
  Top Layer w0.508: v1(10.25,-54) 10.402,-54.152 11.302,-54.152 ; R8_S5.2@12.4,-54.6 R8_S5.2 12.756,-53.5 ; 12.756,-53.186 12.756,-53.5 ; U1_S5.5 22.952,-57.25 18.257,-57.25 16.504,-59.003 12.457,-59.003 11.302,-57.848 11.302,-54.152 ; 11.302,-54.152 11.954,-53.5 12.756,-53.5
NetR4_S1_1: R4_S1.1 U1_S1.1 U1_S1.2 | length 24.9
  Top Layer w0.508: U1_S1.2 U1_S1.1 ; v1@27.1,51.85 R4_S1.1
  Bottom Layer w0.508: U1_S1.2 20.381,59.367 26.347,59.367 27.889,57.825 27.889,52.389 v1(27.045,51.545)
NetR4_S2_1: R4_S2.1 U1_S2.6 U1_S2.7 | length 24
  Top Layer w0.508: R4_S2.1 -28,54 -28,53.25 v1(-28,52.25) ; U1_S2.6 U1_S2.7
  Bottom Layer w0.508: v1(-28,52.25) -28,57.693 -25.89,59.803 -22.726,59.803 -18.543,55.62 U1_S2.7
NetR4_S3_1: R4_S3.1 U1_S3.1 U1_S3.2 | length 5.4
  Top Layer w0.508: R4_S3.1 -25.03,-53.53 -23.91,-52.41 U1_S3.2 U1_S3.1
NetR4_S4_1: R4_S4.1 U1_S4.1 U1_S4.2 | length 5.7
  Top Layer w0.508: R4_S4.1@-6.45,19 -5.834,19 -4.996,19.838 -4.996,20.004 -4.92,20.08 U1_S4.2 U1_S4.1
NetR4_S5_1: R4_S5.1 U1_S5.6 U1_S5.7 | length 8.9
  Top Layer w0.508: v1@25.75,-51 v1(25.5,-51.25) 24.47,-52.28 U1_S5.7 U1_S5.6 23.918,-53.964 R4_S5.1@25.85,-53.964
PWE1: J1.6 J10.23 | length 26.2
  Top Layer w0.508: J1.6 -36.322,9.889 -21.791,24.42 -16.637,24.42 J10.23
PWE2: J2.6 J9.8 | length 33.2
  Top Layer w0.508: J9.8 21.28,-13.97 24.25,-11 24.25,-3.69 J2.6
PWM1: J1.3 J10.24 | length 23.6
  Top Layer w0.508: J1.3 -32.228,17.272 -22.83,26.67 J10.24
PWM2: J1.2 J10.25 | length 23.6
  Top Layer w0.508: J1.2 -32.322,19.812 -22.924,29.21 J10.25
PWM3: J2.3 J9.7 | length 30.8
  Top Layer w0.508: J9.7 21.24,-16.51 26.5,-11.25 26.5,-4.5 31.762,0.762 J2.3
PWM4: J2.2 J9.6 | length 31.6
  Top Layer w0.508: J9.6 16.775,-18.912 23.338,-18.912 28.437,-13.813 28.437,-5.768 32.427,-1.778 J2.2
VCC: C4_S1.1 C4_S2.1 C4_S3.1 C4_S4.1 C4_S5.1 C5_S1.1 C5_S2.1 C5_S3.1 C5_S4.1 C5_S5.1 C6.1 C7.1 J1.7 J2.7 J9.26 J10.1 R3_S1.2 R3_S2.2 R3_S3.2 R3_S4.2 R3_S5.2 R9.2 SW1.2 U1_S1.8 U1_S2.8 U1_S3.8 U1_S4.8 U1_S5.8 U2_S1.8 U2_S2.8 U2_S3.8 U2_S4.8 U2_S5.8 | length 461.8
  Top Layer w0.508: U2_S2.8 -29.12,36.65 C5_S2.1 -28.235,35.765 -37.863,26.137 -37.863,7.863 -37.112,7.112 J1.7 -36.322,-27.822 -37.75,-29.25 SW1.2 -37.5,-30.25 C7.1 -18.137,-30.25 J10.1 ; U2_S3.8 -29.83,-45.64 C5_S3.1 -28.226,-44.896 -18.104,-44.896 C4_S3.1 -16.5,-48.858 U1_S3.8 -14.592,-50.766 R3_S3.2@-13.044,-50.766 ; C4_S2.1@-18.42,61.25 -18.42,59.892 U1_S2.8 -15.828,57.3 R3_S2.2 R3_S1.2 12.756,58.756 13.646,59.646 20.726,59.646 C4_S1.1 22.33,59.212 U1_S1.8 25.594,59.5 36.75,59.5 39.5,56.75 39.5,44.692 28.804,33.996 23.604,33.996 C5_S1.1 ; R3_S3.2 R3_S5.2@12.12,-50.75 ; U2_S4.8 -3.882,30.98 C5_S4.1 1.108,25.99 C4_S4.1 ; R3_S4.2 6,10.53 6,21.497 4.877,22.62 U1_S4.8 2.873,23.497 2.873,25.855 C4_S4.1 ; R9.2 4.46,25.99 C4_S4.1 ; R3_S5.2 12.756,-47.726 15.586,-44.896 18.814,-44.896 U2_S5.8 ; J9.26 18.637,29.75 C6.1 ; U2_S1.8 22,38.02 C5_S1.1 ; J2.7 36.322,24.723 30.547,30.497 21.997,30.497 C6.1 ; C6.1 21,30 21,34.6 C5_S1.1
  Bottom Layer w0.508: J10.1 -16.5,-31.887 C4_S3.1 ; C4_S4.1 4.998,28.25 13.137,28.25 J9.26 ; U1_S5.8 21.33,-48.008 C4_S5.1 ; C5_S5.1 C4_S5.1 ; J2.7 36.391,10.853 36.897,10.853 37.863,9.887 37.863,-5.418 37.422,-5.859 35.222,-5.859 33.518,-4.155 30.05,-4.155 25.5,-8.705 25.5,-38.375 21.442,-42.433 20.38,-42.433 U2_S5.8 20.38,-45.55 C4_S5.1
Vout1: 
Vout2: 
Vout3: 
Vout4: 
Vout5: 
pads on no net: J1.4 J1.5 J2.4 J2.5 J9.1 J9.2 J9.3 J9.4 J9.5 J9.9 J9.10 J9.11 J9.12 J9.13 J9.14 J9.15 J9.16 J9.17 J9.18 J9.20 J10.3 J10.6 J10.7 J10.8 J10.9 J10.12 J10.13 J10.14 J10.15 J10.16 J10.17 J10.18 J10.19 J10.20 J10.21 J10.22 SW1.1

## Polygon pours and split planes (outlines as drawn)
GND on Bottom Layer "GND" (solid, pour order 0): -42.636,-60.114 -40.251,-62.499 39.777,-62.364 43,-59.38 43,58.5 39.75,61.75 -40.5,61.75 -42.636,59.614 -42.636,50.886
GND on Top Layer "GND" (solid, pour order 4): -42.636,-60.114 -40.25,-62.5 39.757,-62.463 43,-59.46 43,58.401 39.75,61.651 -40.5,61.651 -42.636,59.515 -42.636,50.787

## Keep-outs
Keep-Out Layer:
  lines w0.254: -43.942,-63.5 -43.942,63.5 43.942,63.5 43.942,-63.5 -43.942,-63.5

## Other copper
Bottom Layer:
  text "EE 310 / Grp 3" at -40.25,22.5 h2.2 r90

## Silkscreen, mask and mechanical layers (free items; w line width, h text height)
Top Overlay:
  text "GND" at -14.986,31.242 h1.02
  text "VDIO" at 11.557,30.988 h1.02
  text "3.0" at -14.986,28.702 h1.02
  text "GND" at 11.684,28.194 h1.02
  text "3.1" at -14.986,26.162 h1.02
  text "1.7" at 11.811,26.162 h1.02
  text "3.2" at -14.986,23.622 h1.02
  text "1.6" at 11.811,23.622 h1.02
  text "D1" at -34.798,21.717 h1.02
  text "1.5" at 11.811,21.209 h1.02
  text "3.3" at -14.986,21.082 h1.02
  text "IN2" at -34.925,19.177 h1.02
  text "3.4" at -14.986,18.542 h1.02
  text "1.4" at 11.811,18.542 h1.02
  text "IN1" at -34.925,16.637 h1.02
  text "3.5" at -14.986,16.002 h1.02
  text "1.3" at 11.811,16.002 h1.02
  text "SLW" at -35.052,14.351 h1.02
  text "1.2" at 11.811,13.589 h1.02
  text "3.6" at -14.986,13.462 h1.02
  text "INV" at -34.925,11.811 h1.02
  text "3.7" at -14.986,10.922 h1.02
  text "1.1" at 11.811,10.922 h1.02
  text "D2" at 32.893,10.541 h1.02
  text "EN" at -34.798,9.398 h1.02
  text "15.0" at -15.113,8.382 h1.02
  text "1.0" at 11.811,8.382 h1.02
  text "EN" at 32.766,7.874 h1.02
  text "D2" at -34.798,6.604 h1.02
  text "15.1" at -14.986,5.842 h1.02
  text "12.0" at 11.811,5.842 h1.02
  text "INV" at 32.258,5.588 h1.02
  text "12.1" at 11.811,3.429 h1.02
  text "15.2" at -15.113,3.302 h1.02
  text "SLW" at 32.258,2.667 h1.02
  text "15.3" at -15.113,0.762 h1.02
  text "12.2" at 11.811,0.635 h1.02
  text "IN1" at 32.639,0.381 h1.02
  text "15.4" at -15.113,-1.778 h1.02
  text "12.3" at 11.811,-1.778 h1.02
  text "IN2" at 32.258,-2.286 h1.02
  text "15.5" at -15.113,-4.318 h1.02
  text "12.4" at 11.811,-4.318 h1.02
  text "D1" at 33.147,-5.334 h1.02
  text "0.0" at -14.986,-6.858 h1.02
  text "12.5" at 11.811,-6.858 h1.02
  text "0.1" at -14.986,-9.398 h1.02
  text "12.6" at 11.811,-9.398 h1.02
  text "0.2" at -14.986,-11.938 h1.02
  text "12.7" at 11.811,-11.938 h1.02
  text "0.3" at -14.986,-14.478 h1.02
  text "2.7" at 11.811,-14.478 h1.02
  text "0.4" at -14.986,-17.018 h1.02
  text "2.6" at 11.811,-17.018 h1.02
  text "0.5" at -14.986,-19.558 h1.02
  text "2.5" at 11.811,-19.558 h1.02
  text "0.6" at -14.986,-22.098 h1.02
  text "2.4" at 11.811,-22.225 h1.02
  text "0.7" at -14.986,-24.638 h1.02
  text "2.3" at 11.811,-24.638 h1.02
  text "RST" at -14.986,-27.178 h1.02
  text "2.2" at 11.811,-27.178 h1.02
  text "GND" at -14.986,-28.829 h1.02
  text "2.1" at 11.811,-29.718 h1.02
  text "2.0" at 11.811,-32.258 h1.02
  text "VDD" at -14.986,-33.147 h1.02
Mechanical 1:
  lines w0.508: -20.35,-38.1 -19.75,-38.1

## Text inside footprints (layer, text, board x,y; h text height)
C6: Top Overlay "+" at 20.5,32.725 h1.5 r270
C7: Top Overlay "+" at -20.75,-33.225 h1.5 r90